# EAGLE board cascade_sampler (EAGLE 9.2.2)
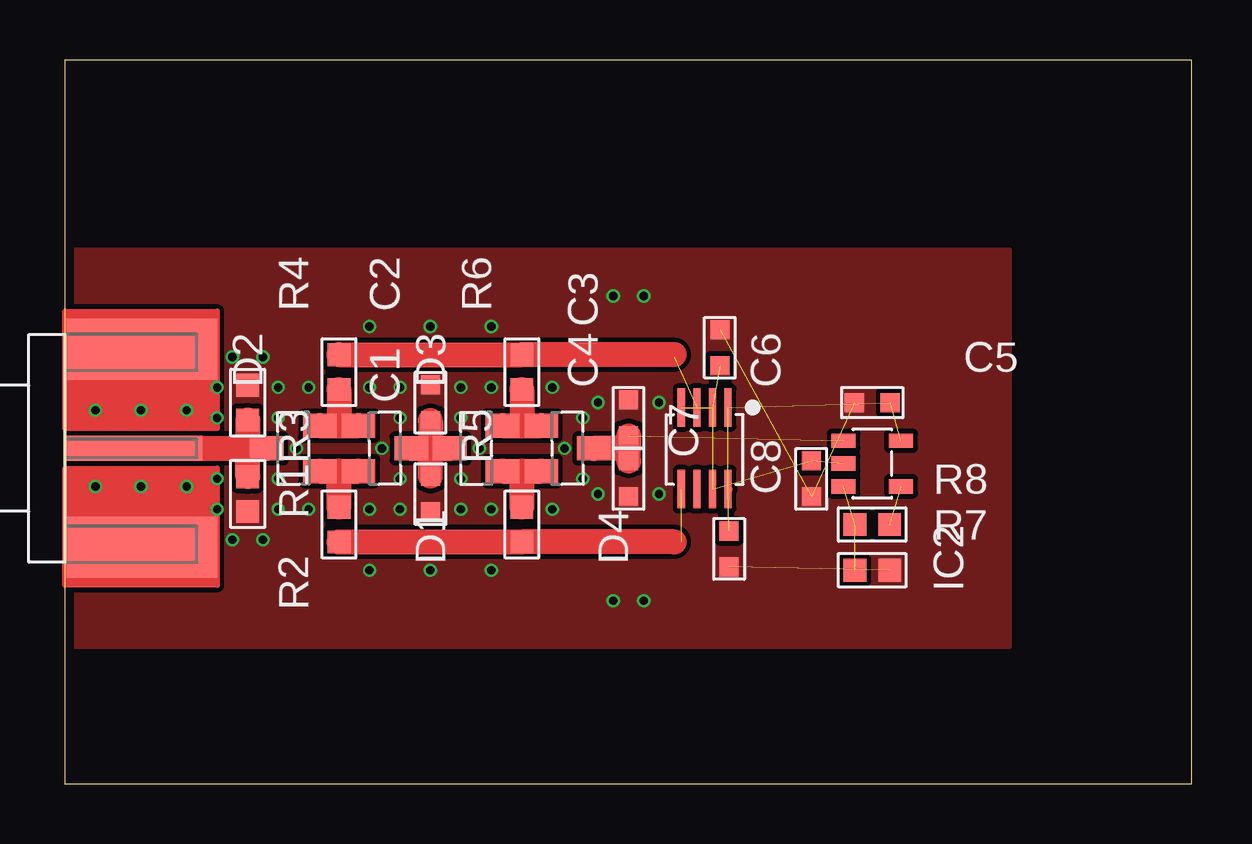
[diagram p0: board, top side]
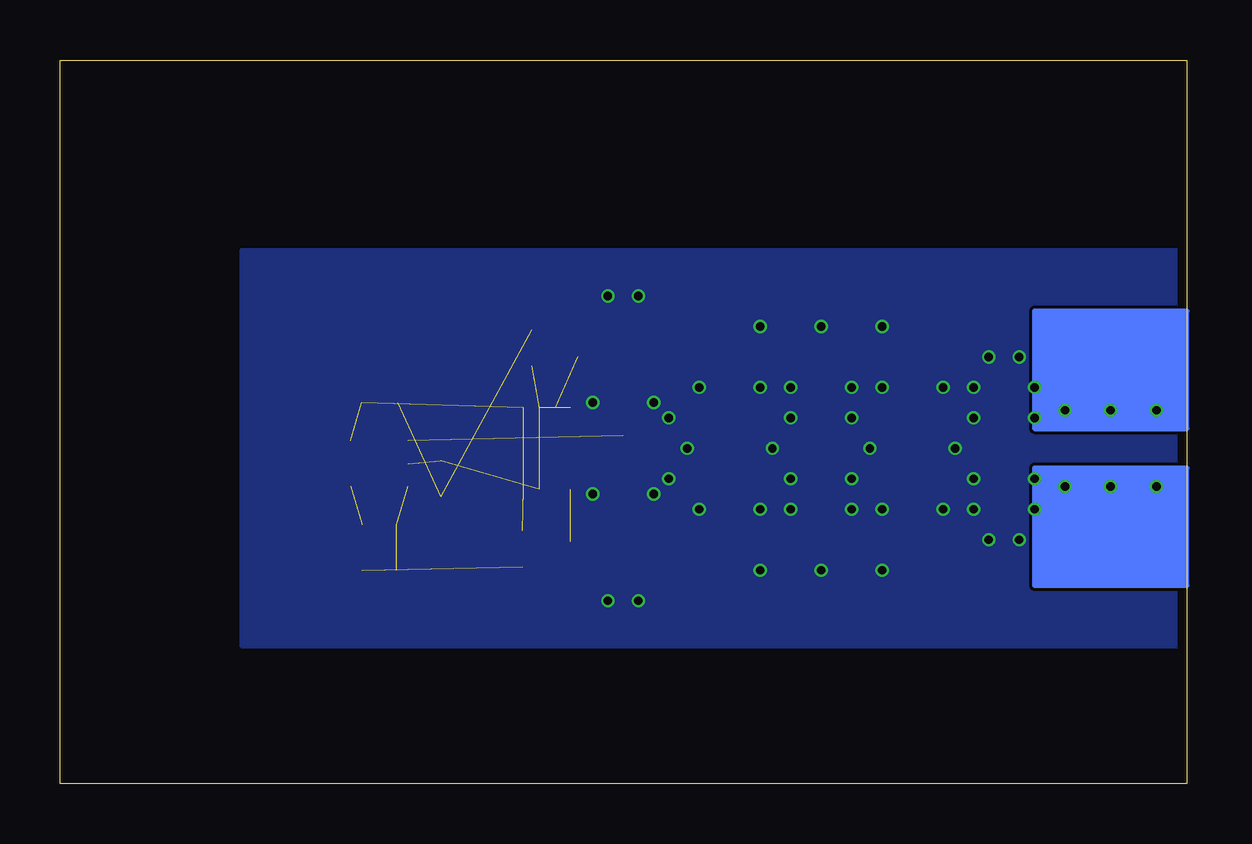
[diagram p1: board, bottom side, seen from below]

Size 46.97 x 30.15 mm. Coordinates in mm from the lower left corner, seen from the top.
Outline: 0,0 46.97,0 46.97,30.15 0,30.15 0,0
Copper layers (1*2*15*16): Top 0.035559375mm / dielectric 0.17018125mm / Route2 0.01778125mm / dielectric 47mil / Route15 0.01778125mm / dielectric 0.17018125mm / Bottom 0.035559375mm
Design rules "oshpark-4layer": minimum track width 5mil, minimum drill 10mil, track to track 5mil, track to pad 5mil, pad to pad 5mil, via to via 5mil, smd to smd 5mil, copper to edge 15mil, drill to drill 6mil, minimum pad ring 4mil, minimum via ring 4mil, stop-mask expansion 2.5mil, vias tented up to drill 0mil, thermal gap 10mil

## Footprints (pad centres in the part's own frame; a part is rotated, then mirrored left to right if it is on the bottom)
C0603 = smd 0.8 x 0.8: P$1 -0.75,0; P$2 0.75,0
SOT-23 = smd 1 x 1.4: 1 -0.95,-1.1; 2 0.95,-1.1; 3 0,1.1
SSOP8 = smd 0.3 x 1.6: 1 -0.975,-1.7; 2 -0.325,-1.7; 3 0.325,-1.7; 4 0.975,-1.7; 5 0.975,1.7; 6 0.325,1.7; 7 -0.325,1.7; 8 -0.975,1.7
SOT23-5 = smd 0.6 x 1: 1 -0.95,-1.2; 2 0,-1.2; 3 0.95,-1.2; 4 0.95,1.2; 5 -0.95,1.2
EDGE_LAUNCH_RF_CON_NARROW = smd 5.715 x 1.041: CENTER -2.875,0 | drill 0.35: GND@1 -5.08,1.587; GND@2 -3.175,1.587; GND@3 -1.27,1.587; GND@4 -5.08,-1.587; GND@5 -3.175,-1.587; GND@6 -1.27,-1.587 | smd 6.35 x 2.54: SHIELD@1 -3.175,-4.128; SHIELD@2 -3.175,4.128
R0603 = smd 0.95 x 0.95: P$1 -0.725,0; P$2 0.725,0

## Placement (x,y rotation side)
C1  [C0603]  15.24,12.06 90 top
C2  [C0603]  15.24,15.88 90 top
C3  [C0603]  23.5,15.24 90 top
C4  [C0603]  23.5,12.7 90 top
C5  [C0603]  33.66,15.88 0 top
C6  [C0603]  31.11,12.7 90 top
C7  [C0603]  27.69,9.78 90 top
C8  [C0603]  27.3,18.16 270 top
D1  [SOT-23]  13.34,13.97 270 top
D2  [SOT-23]  9.53,13.97 90 top
D3  [SOT-23]  17.14,13.97 90 top
D4  [SOT-23]  20.95,13.97 270 top
IC1  [SSOP8]  26.67,13.97 180 top
IC2  [SOT23-5]  33.66,13.34 270 top
J1  [EDGE_LAUNCH_RF_CON_NARROW]  0,13.97 180 top
R1  [R0603]  7.62,15.88 270 top
R2  [R0603]  7.62,12.06 270 top
R3  [R0603]  11.43,10.79 90 top
R4  [R0603]  11.43,17.14 90 top
R5  [R0603]  19.05,10.79 90 top
R6  [R0603]  19.05,17.14 90 top
R7  [R0603]  33.66,8.89 0 top
R8  [R0603]  33.66,10.79 0 top

## Library data of the parts
C1-C8 D1-D4 IC1 IC2 J1 R1-R8 = yapo

## Nets
+2.5V: C5.P$2 C7.P$2 IC1.1 IC1.8 IC2.5
-2.5V: C6.P$2 C8.P$2 IC1.2 IC1.4 IC1.7 IC2.2
GND: C1.P$1 C2.P$2 C3.P$2 C4.P$1 C5.P$1 C6.P$1 C7.P$1 C8.P$1 J1.GND@1 J1.GND@2 J1.GND@3 J1.GND@4 J1.GND@5 J1.GND@6 J1.SHIELD@1 J1.SHIELD@2 R1.P$1 R2.P$2 R7.P$2
N$1: D2.3 J1.CENTER R1.P$2 R2.P$1
N$2: C1.P$2 C2.P$1 D1.3 D3.3
N$3: D1.2 D2.1 R3.P$2
N$4: D1.1 D2.2 R4.P$1
N$5: C3.P$1 C4.P$2 D4.3 IC2.1
N$6: D3.1 D4.2 R5.P$2
N$7: D3.2 D4.1 R6.P$1
N$8: IC2.3 R7.P$1 R8.P$1
N$9: IC2.4 R8.P$2
S+: IC1.5 R3.P$1 R5.P$1
S-: IC1.3 R4.P$2 R6.P$2

## Tracks (layer width: path | path; a pad name or v marks a point on that pad's centre or on a via)
+2.5V  (4 unrouted)
  Top 0.305: 27.69,12.27 IC1.8
-2.5V  (5 unrouted)
GND  (via drill 0.35)  (3 unrouted)
  other vias: 6.35,16.51 6.99,17.78 8.26,17.78 8.89,16.51 8.89,11.43 8.26,10.16 6.99,10.16 6.35,11.43 12.7,19.05 12.7,16.51 13.97,16.51 12.7,11.43 12.7,8.89 13.97,11.43 15.24,8.89 17.78,8.89 16.51,11.43 17.78,11.43 15.24,19.05 16.51,16.51 17.78,19.05 17.78,16.51 22.23,15.88 22.86,20.32 24.13,20.32 24.77,15.88 22.23,12.06 22.86,7.62 24.13,7.62 24.77,12.06 13.97,15.24 13.97,12.7 8.89,15.24 8.89,12.7 16.51,15.24 16.51,12.7 21.59,15.24 21.59,12.7 20.32,16.51 20.32,11.43 10.16,16.51 10.16,11.43 9.65,13.97 13.21,13.97 17.27,13.97 20.83,13.97 6.35,15.24 6.35,12.7
  pour Top (isolate 0.203, no thermals): 0,5.71 39.37,5.71 39.37,22.23 0,22.23
  pour Bottom: 0,5.71 39.37,5.71 39.37,22.23 0,22.23
N$1
  Top 1.041: J1.CENTER 7.62,13.97 | 7.62,13.97 D2.3 | R1.P$2 7.62,13.97 | R2.P$1 7.62,13.97
N$2
  Top 1.041: D1.3 15.24,13.97 | 15.24,13.97 D3.3 | C2.P$1 15.24,13.97 | C1.P$2 15.24,13.97
N$3
  Top 1.041: D2.1 11.43,13.02 | 11.43,13.02 D1.2 | R3.P$2 11.43,13.02
N$4
  Top 1.041: D2.2 11.43,14.92 | 11.43,14.92 D1.1 | R4.P$1 11.43,14.92
N$5  (1 unrouted)
  Top 1.041: 23.5,13.97 D4.3 | C3.P$1 23.5,13.97 | C4.P$2 23.5,13.97
N$6
  Top 1.041: D3.1 19.05,13.02 | 19.05,13.02 D4.2 | R5.P$2 19.05,13.02
N$7
  Top 1.041: D3.2 19.05,14.92 | 19.05,14.92 D4.1 | R6.P$1 19.05,14.92
N$8  (2 unrouted)
N$9  (1 unrouted)
S+  (1 unrouted)
  Top 0.305: 25.7,10.07 25.4,10.07
  Top 1.041: R3.P$1 R5.P$1 25.4,10.07
S-  (1 unrouted)
  Top 0.305: 25.4,17.78 25.4,17.87
  Top 1.041: R4.P$2 R6.P$2 25.4,17.87